# Altium PCB ROBOT_MOTHERBOARD.PcbDoc (part 3 of 3)
Units mm, origin at the board's own origin, x right, y up, seen from the top; angles counter-clockwise.
Board outline 122.81 x 59.7 mm, 4 copper layers (SIG1, GND, PWR, SIG2), stack 0.603 mm thick; 150 components, 74 nets, 540 pads, 464 vias.
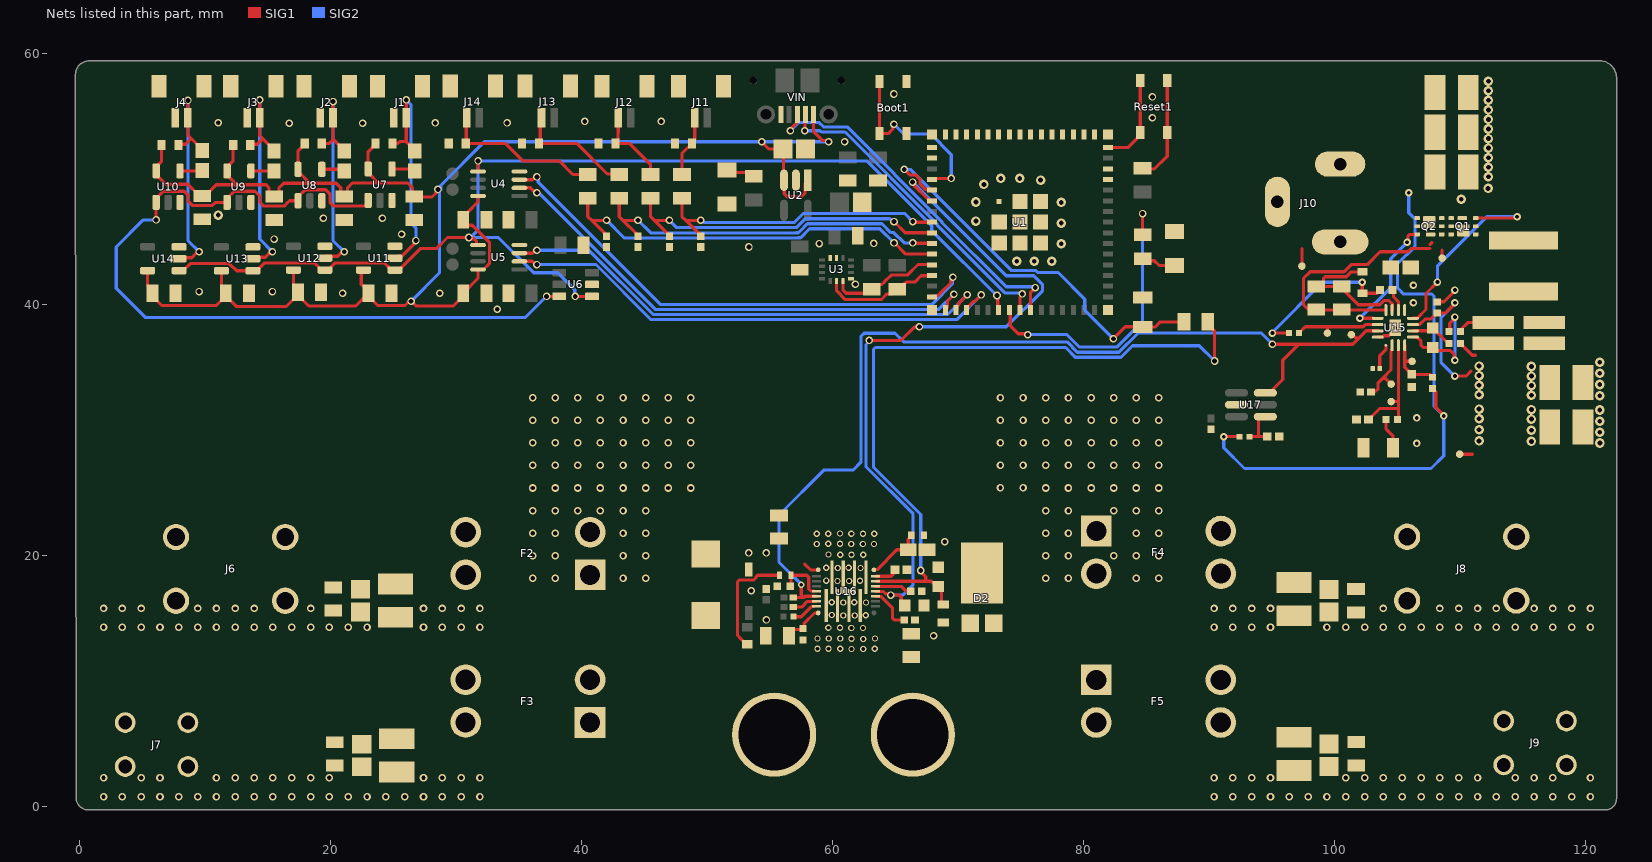
[diagram p4: the nets of this part, all layers, seen from the top]

## Via types
v1: diameter 0.6, hole 0.35, SIG1 to SIG2, 251 vias
v2: diameter 0.6, hole 0.381, SIG1 to SIG2, 93 vias
v3: diameter 0.762, hole 0.381, SIG1 to SIG2, 50 vias
v4: diameter 0.5, hole 0.3, SIG1 to SIG2, 50 vias
v5: diameter 0.6, hole 0.3, SIG1 to SIG2, 18 vias
v6: diameter 4, hole 3.048, SIG1 to SIG2, 2 vias

## Nets (pads, with @x,y where several pads share a name; then routed paths per layer and width w, separated by ;. In a path a pad name is that pad's centre, name@x,y a point inside that pad or via, vN(x,y) a via of type N, cw(c..) or ccw(c..) an arc to the next point about the centre after c; other vN are vias at no path point) (continued)
11V1: C32.1 D1.1 J5.P R18.1 R25.2 R27.1 U16.23 U16.24 U16.25 U16.26 | length 9
  SIG1 w0.254: R27.1@53.213,12.912 53.136,12.912 52.663,13.386 52.427,13.622 52.427,17.889 52.576,18.037 53.736,18.037 53.899,18.2 53.899,18.266 54.047,18.415 R25.2@55.792,18.415
  other v4: 61.512,12.537 62.454,12.548 58.799,12.557 59.688,12.557 60.613,12.557 63.371,12.557 61.521,13.35 62.457,13.345 58.807,13.37 59.696,13.37 60.622,13.37 63.379,13.37 62.434,14.205 59.671,14.224 60.596,14.224 61.505,14.22 60.854,15.217 61.773,15.206 59.946,15.242 62.646,15.227 59.946,16.26 60.865,16.249 61.734,16.262 62.675,16.241
11V1+: C36.1 Cin1.1 Cin2.1 Cvin.2 D2.3 F2.1 F3.1 F4.1 F5.1 pad.2@109.982,28.067 Risns+.1 Rsns1.1 Rsns2.1 U15.7 U16.10 U16.11 U16.12 U16.13 | length 14.9
  SIG1 w0.254: U15.7@106.253,38.398 106.261,38.405 106.813,38.405 107.243,38.835 107.685,38.835 Cvin.2@108.174,39.324 ; Cvin.2@108.204,39.324 108.887,39.324 109.601,40.038 v5(109.601,40.132) ; v5(109.601,34.29) 110.485,34.29 110.871,34.676 ; pad.2@109.982,28.067 110.998,28.067 ; Risns+.1@110.037,36.895 110.986,35.946 111.252,35.946 ; Rsns2.1@112.23,36.844 Rsns2.1@112.248,36.862
  SIG2 w0.254: v5(109.601,34.29) 108.484,35.407 108.484,38.921 109.601,40.038 v5(109.601,40.132)
  other v1: 36.106,18.171 37.906,18.171 43.306,18.171 45.106,18.171 77.006,18.171 78.806,18.171 84.206,18.171 86.006,18.171 36.106,19.971 37.906,19.971 43.306,19.971 45.106,19.971 77.006,19.971 78.806,19.971 82.406,19.971 84.206,19.971 86.006,19.971 36.106,21.771 37.906,21.771 43.306,21.771 45.106,21.771 77.006,21.771 78.806,21.771 84.206,21.771 86.006,21.771 36.106,23.571 37.906,23.571 39.706,23.571 41.506,23.571 43.306,23.571 45.106,23.571 77.006,23.571 78.806,23.571 82.406,23.571 84.206,23.571 86.006,23.571 36.106,25.371 37.906,25.371 39.706,25.371 41.506,25.371 43.306,25.371 45.106,25.371 46.906,25.371 48.706,25.371 73.384,25.378 75.184,25.378 77.006,25.371 78.806,25.371 80.606,25.371 82.406,25.371 84.206,25.371 86.006,25.371 36.106,27.171 37.906,27.171 39.706,27.171 41.506,27.171 43.306,27.171 45.106,27.171 46.906,27.171 48.706,27.171 73.384,27.178 75.184,27.178 77.006,27.171 78.806,27.171 80.606,27.171 82.406,27.171 84.206,27.171 86.006,27.171 36.106,28.971 37.906,28.971 39.706,28.971 41.506,28.971 43.306,28.971 45.106,28.971 46.906,28.971 48.706,28.971 73.384,28.978 75.184,28.978 77.006,28.971 78.806,28.971 80.606,28.971 82.406,28.971 84.206,28.971 86.006,28.971 36.106,30.771 37.906,30.771 39.706,30.771 41.506,30.771 43.306,30.771 45.106,30.771 46.906,30.771 48.706,30.771 73.384,30.778 75.184,30.778 77.006,30.771 78.806,30.771 80.606,30.771 82.406,30.771 84.206,30.771 86.006,30.771 36.106,32.571 37.906,32.571 39.706,32.571 41.506,32.571 43.306,32.571 45.106,32.571 46.906,32.571 48.706,32.571 73.384,32.578 75.184,32.578 77.006,32.571 78.806,32.571 80.606,32.571 82.406,32.571 84.206,32.571 86.006,32.571
  other v3: 115.697,29.083 111.526,29.12 115.697,29.972 111.526,30.009 115.697,30.861 111.526,30.898 115.697,31.623 111.526,31.66 115.697,32.766 111.526,32.803 115.697,33.528 111.526,33.565 115.697,34.29 111.526,34.327 115.697,35.052 111.526,35.089
  other v4: 60.406,17.963 61.325,17.953 59.497,17.989 62.197,17.974 59.497,19.006 60.416,18.996 62.227,18.987 61.285,19.009 59.683,20.07 60.612,20.054 61.52,20.051 62.446,20.051 58.737,20.905 61.495,20.905 62.42,20.905 63.309,20.905 59.659,20.929 60.596,20.925 58.746,21.717 61.504,21.717 62.429,21.717 63.318,21.717 59.663,21.727 60.605,21.737
11V1_F2: C20.1 C21.2 C22.1 F2.2 J6.1_1 J6.1_2
11V1_F3: C23.1 C24.2 C25.1 F3.2 J7.1_1 J7.1_2
11V1_F4: C26.1 C27.2 C28.1 F4.2 J8.2_1 J8.2_2
11V1_F5: C29.1 C30.2 C31.1 F5.2 J9.2_1 J9.2_2
18V: Cout1.1 Cout2.1 Cout3.1 J10.1 pad.2@97.409,43.053 Q2.1 Q2.2 Q2.5 Q2.6 Q2.8 R32.1 Rfbt.2 | length 49.3
  SIG1 w0.254: v5(91.186,29.464) R32.1@92.437,29.464 ; pad.2@97.409,43.053 97.409,44.45 ; Rfbt.2@107.823,33.299 108.077,33.045 108.077,31.795 108.712,31.16 v5(108.712,31.115)
  SIG2 w0.254: v5(91.186,29.464) 91.186,28.575 92.837,26.924 107.696,26.924 108.712,27.94 v5(108.712,31.115) 107.924,31.903 107.924,40.671 107.775,40.82 105.523,40.82 105.029,41.314 105.029,43.253 106.426,44.65 106.426,46.795 105.918,47.303 v5(105.918,48.895)
+5: C3.2 C7.1 C8.1 C9.1 C10.1 C11.1 C12.1 C13.1 C14.1 C16.1 C18.1 R11.2 R13.2 R15.2 R17.2 U2.1 U2.3 U4.8 U5.8 U7.5 U8.5 U9.5 U10.5 U11.5 U12.5 U13.5 U14.5 VIN.1 | length 141.3
  SIG1 w0.254: C14.1@5.418,41.507 U14.5@5.418,42.692 ; C14.1@5.806,40.894 5.806,40.669 6.558,39.917 10.888,39.917 11.648,40.677 12.481,39.844 16.49,39.844 C12.1@17.396,40.75 ; R17.2@6.521,52.705 6.521,51.384 6.101,50.964 U10.5@6.101,50.643 6.101,50.333 6.851,49.583 8.612,49.583 9.554,48.641 C10.1@9.779,48.641 10.004,48.641 10.893,49.53 12.517,49.53 ; U13.5@11.303,42.685 11.303,41.247 C13.1@11.648,40.902 ; U9.5@11.684,50.363 12.517,49.53 ; U9.5@11.684,50.673 11.684,50.898 12.236,51.45 R15.2@12.236,52.705 ; U12.5@17.033,42.738 17.033,41.563 17.396,41.2 C12.1@17.396,40.975 C12.1@17.396,40.75 ; R13.2@17.951,52.832 17.951,52.755 17.399,52.204 17.399,50.775 U8.5@17.404,50.77 17.404,50.606 18.353,49.657 ; U11.5@22.621,42.738 22.606,42.738 22.439,42.572 22.439,41.613 22.588,41.464 22.661,41.464 23.009,41.116 C11.1@23.009,40.891 ; R11.2@23.572,52.832 23.572,52.755 22.992,52.175 U7.5@22.992,50.8 22.992,50.49 23.802,49.68 ; v2(28.553,49.163) 28.553,49.025 28.086,48.557 28.086,48.553 26.703,48.553 C7.1@26.67,48.586 26.526,48.73 26.526,49.293 26.139,49.68 23.802,49.68 ; C16.1@30.571,46.736 30.713,46.878 30.713,46.518 30.919,46.312 31.278,46.312 32.639,44.951 32.639,44.933 32.654,44.918 32.654,43.25 32.188,42.784 U5.8@31.75,42.784 31.75,42.073 C18.1@30.571,40.894 30.571,40.669 29.78,39.878 26.819,39.878 26.438,40.259 v2(26.416,40.259) 26.279,40.259 25.934,39.914 23.761,39.914 23.009,40.666 C11.1@23.009,40.891 ; C16.1@30.695,46.896 30.919,47.12 30.919,47.349 31.751,48.181 U4.8@31.751,48.641 ; v2(54.356,52.959) 54.928,52.387 C3.2@56.056,52.387 ; C3.2@56.097,52.169 56.097,49.812 56.158,49.751 56.158,48.817 56.399,48.577 57.513,48.577 57.816,48.88 57.816,49.631 U2.1@57.997,49.812 ; VIN.1@58.494,55.148 58.494,53.774 59.212,53.056 59.593,53.056 v2(59.69,52.959) ; 12.517,49.53 14.859,49.53 15.096,49.293 15.096,48.934 15.444,48.586 C9.1@15.494,48.586 15.494,48.895 15.853,48.895 15.892,48.934 15.892,49.293 16.256,49.657 18.353,49.657 ; C12.1@17.396,40.75 18.268,39.878 21.996,39.878 C11.1@23.009,40.891 ; 18.353,49.657 20.447,49.657 20.811,49.293 20.811,48.857 C8.1@21.082,48.586 21.353,48.857 21.353,49.293 21.74,49.68 23.802,49.68
  SIG2 w0.254: v2(26.416,40.259) 28.677,42.52 28.677,49.039 v2(28.553,49.163) ; v2@28.681,49.043 28.774,49.136 28.774,49.475 32.258,52.959 v2(54.356,52.959) v2(59.69,52.959)
Blink: R3.1 U1.22 | length 23.7
  SIG1 w0.254: U1.22@74.088,39.556 74.161,39.483 74.161,38.291 74.794,37.658 75.499,37.658 v2(75.565,37.592) ; v2(84.709,47.244) 84.709,45.549 R3.1@84.719,45.539
  SIG2 w0.254: v2(75.565,37.592) 78.692,37.592 79.685,36.599 82.66,36.599 84.709,38.648 v2(84.709,47.244)
Boot: Cboot1.2 Cboot2.2 Dboot.C U15.11 | length 11.6
  SIG1 w0.254: Cboot1.2@98.552,41.438 Cboot1.2@98.777,41.438 ; Cboot2.2@100.505,41.359 101.888,39.976 103.61,39.976 103.938,40.304 104.349,40.304 104.603,40.05 U15.11@104.603,39.549 ; Cboot2.2@100.584,41.438 Cboot1.2@98.777,41.438 ; Dboot.C@102.235,42.594 101.331,42.594 100.936,42.199 99.274,42.199 99.125,42.05 99.125,41.786 Cboot1.2@98.777,41.438 ; Dboot.C@102.262,42.767 Dboot.C@102.362,42.767
COMP: Ccomp2.1 pad.@104.521,32.258 Rcomp.2 U15.3 | length 9.3
  SIG1 w0.254: Ccomp2.1@102.723,30.829 102.744,30.829 103.633,31.718 105.103,31.718 ; pad.@104.521,32.258 105.103,32.258 ; Rcomp.2@105.024,30.829 105.103,30.908 105.103,31.718 ; U15.3@105.103,36.747 105.103,32.258 ; 105.103,31.718 105.103,32.258
D+: U1.24 VIN.3 | length 29
  SIG1 w0.254: v2(56.642,53.848) 56.642,53.968 57.121,54.447 57.121,55.075 VIN.3@57.194,55.148 ; U1.24@75.788,39.35 U1.24@75.788,39.556 75.788,40.969 v2(76.163,41.344)
  SIG2 w0.254: v2(56.642,53.848) 57.3,54.506 58.919,54.506 59.279,54.146 61.17,54.146 68.72,46.596 68.72,46.532 73.842,41.41 76.097,41.41 v2(76.163,41.344)
D-: U1.23 VIN.2 | length 25.4
  SIG1 w0.254: v2(57.785,53.848) 57.814,53.877 57.814,55.119 VIN.2@57.844,55.148 ; U1.23@74.938,39.556 74.938,40.559 75.118,40.739 v2(75.118,40.833)
  SIG2 w0.254: v2(57.785,53.848) 59.006,53.848 59.112,53.742 61.002,53.742 68.316,46.428 68.316,46.365 73.782,40.899 75.052,40.899 v2(75.118,40.833)
DVDT: C37.1 U16.4 | length 3.5
  SIG1 w0.254: U16.4@63.431,16.714 63.895,16.714 64.77,15.84 64.77,15.008 64.919,14.859 C37.1@65.648,14.859
F_PG: pad.@101.346,37.592 R24.2 U15.15 U16.19 U17.6 | length 76.8
  SIG1 w0.254: R24.2@56.872,16.637 57.728,16.637 ; v4(57.512,17.653) 57.512,16.853 57.728,16.637 ; U16.19@58.731,16.738 57.828,16.738 57.728,16.637 ; U17.6@94.495,32.954 94.824,32.954 95.885,34.015 95.885,35.56 97.155,36.83 ; v2(95.063,36.83) 97.155,36.83 ; pad.@101.346,37.592 101.44,37.592 101.734,37.298 101.94,37.298 ; U15.15@103.452,37.898 102.54,37.898 101.94,37.298 ; 97.155,36.83 101.472,36.83 101.94,37.298
  SIG2 w0.254: v4(57.512,17.653) 57.512,17.69 55.734,19.468 55.734,23.222 59.309,26.797 61.635,26.797 62.261,27.423 62.261,27.717 62.265,27.721 62.265,37.443 62.528,37.706 64.983,37.706 65.674,37.015 78.697,37.015 79.517,36.195 82.828,36.195 84.352,37.719 94.174,37.719 v2(95.063,36.83)
FB: pad.@106.187,35.469 Rfbb.1 Rfbt.1 U15.4 | length 4.9
  SIG1 w0.254: U15.4@105.603,36.747 105.603,35.433 ; pad.@106.187,35.469 105.638,35.469 105.603,35.433 ; Rfbt.1@107.823,34.199 107.6,34.422 Rfbb.1@106.172,34.422 105.603,34.989 105.603,35.433
FLT: R19.2 U16.20 | length 2
  SIG1 w0.254: R19.2@56.872,15.875 57.537,15.875 57.996,16.334 U16.20@58.727,16.334
FSR1: J11.2 R6.1 R28.1 | length 4.9
  SIG1 w0.254: R28.1@48,50.351 48,52.03 R6.1@48.802,52.832 ; R6.1@48.802,52.909 49.022,53.129 J11.2@49.022,54.867
FSR2: J12.2 R7.1 R29.1 | length 6.4
  SIG1 w0.254: J12.2@42.926,54.867 42.926,53.67 42.908,53.653 42.908,53.034 R7.1@42.706,52.832 43.815,52.832 45.5,51.147 R29.1@45.5,50.351
FSR3: J13.2 R8.1 R30.1 | length 9.5
  SIG1 w0.254: R8.1@36.61,52.832 36.709,52.931 36.709,54.78 J13.2@36.808,54.879 ; R8.1@36.709,52.832 39.624,52.832 42.064,50.392 42.975,50.392 R30.1@43.017,50.351
FSR4: J14.2 R9.1 R31.1 | length 12.8
  SIG1 w0.254: J14.2@30.839,54.879 30.807,54.847 30.807,52.864 R9.1@30.776,52.832 33.909,52.832 35.306,51.435 38.227,51.435 39.311,50.351 R31.1@40.5,50.351
GND: 38.2 BLINK.2 Boot1.1 Boot1.2 C1.2 C2.2 C3.1 C4. C5.2 C6.1 C7.2 C8.2 C9.2 C10.2 C11.2 C12.2 C13.2 C14.2 C15.2 C16.2 C17.2 C18.2 C19.2 C20.2 C21.1 C22.2 C23.2 C24.1 C25.2 C26.2 C27.1 C28.2 C29.2 C30.1 C31.2 C32.2 C33.2 C34.1 C35.1 C36.2 C37.2 C39.1 C40.2 C41.2 C42.2 C43.2 C44.2 C45.2 CADC.2 Ccomp1.2 Ccomp2.2 Cin1.2 Cin2.2 Cout1.2 Cout2.2 Cout3.2 CR1.2 Css.2 Cvcc.2 Cvin.1 D1.2 D2.1 D2.2 J1.2 J1.3 J1.4 J2.2 J2.3 J2.4 J3.2 J3.3 J3.4 J4.2 J4.3 J4.4 J5.N J6.2_1 J6.2_2 J7.2_1 J7.2_2 J8.1_1 J8.1_2 J9.1_1 J9.1_2 J10.2 J10.3 J11.3 J11.4 J12.3 J12.4 J13.3 J13.4 J14.3 J14.4 PWR.2 Q1.4 Q1.7 R6.2 R7.2 R8.2 R9.2 R21.2 R22.2 R23.1 R26.2 R33.2 Reset1.3 Reset1.4 Rfbb.2 Rt.2 U1.1 U1.2 U1.42 U1.43 U1.45 U1.46 U1.47 U1.48 U1.49 U1.50 U1.51 U1.52 U1.53 U1.54 U1.55 U1.56 U1.57 U1.58 U1.59 U1.60 U1.61 U1.61_1 U1.61_2 U1.61_3 U1.61_4 U1.61_5 U1.61_6 U1.61_7 U1.61_8 U1.62 U1.63 U1.64 U1.65 U2.2 U3.1 U3.6 U3.7 U4.4 U5.4 U6.2 U7.3 U8.3 U9.3 U10.3 U11.3 U12.3 U13.3 U14.3 U15.9 U15.16 U15.17 U16.14 U17.2 VIN.5 | length 12
  SIG1 w0.254: 57.785,19.304 58.245,18.844 U16.14@58.862,18.844 ; U1.45@82.224,52.501 83.527,52.501 84.524,53.498 Reset1.4@84.524,53.698 Reset1.3@84.524,57.848 ; U15.16@103.452,37.398 103.833,37.398 103.937,37.501 103.962,37.501 103.964,37.503 104.335,37.503 104.457,37.625 104.53,37.625 104.853,37.948 v4(104.853,38.148) ; Cvin.1@108.204,40.188 108.224,40.209 108.736,40.209 109.601,41.074 v5(109.601,41.148)
  other v1: 1.906,0.771 3.406,0.771 4.906,0.771 6.406,0.771 7.906,0.771 9.406,0.771 10.906,0.771 12.406,0.771 13.906,0.771 15.406,0.771 16.906,0.771 18.406,0.771 19.906,0.771 21.406,0.771 22.906,0.771 24.406,0.771 25.906,0.771 27.406,0.771 28.906,0.771 30.406,0.771 31.906,0.771 90.406,0.771 91.906,0.771 93.406,0.771 94.906,0.771 96.406,0.771 97.906,0.771 99.406,0.771 100.906,0.771 102.406,0.771 103.906,0.771 105.406,0.771 106.906,0.771 108.406,0.771 109.906,0.771 111.406,0.771 112.906,0.771 114.406,0.771 115.906,0.771 117.406,0.771 118.906,0.771 120.406,0.771 1.906,2.271 4.906,2.271 6.406,2.271 10.906,2.271 12.406,2.271 13.906,2.271 15.406,2.271 16.906,2.271 18.406,2.271 19.906,2.271 27.406,2.271 28.906,2.271 30.406,2.271 31.906,2.271 90.406,2.271 91.906,2.271 93.406,2.271 94.906,2.271 100.906,2.271 102.406,2.271 103.906,2.271 105.406,2.271 106.906,2.271 108.406,2.271 109.906,2.271 111.406,2.271 114.406,2.271 115.906,2.271 117.406,2.271 120.406,2.271 1.906,14.271 3.406,14.271 4.906,14.271 6.406,14.271 7.906,14.271 9.406,14.271 10.906,14.271 12.406,14.271 13.906,14.271 15.406,14.271 16.906,14.271 18.406,14.271 19.906,14.271 21.406,14.271 22.906,14.271 27.406,14.271 28.906,14.271 30.406,14.271 31.906,14.271 90.406,14.271 91.906,14.271 93.406,14.271 94.906,14.271 99.406,14.271 100.906,14.271 102.406,14.271 103.906,14.271 105.406,14.271 106.906,14.271 108.406,14.271 109.906,14.271 111.406,14.271 112.906,14.271 114.406,14.271 115.906,14.271 117.406,14.271 118.906,14.271 120.406,14.271 1.906,15.771 3.406,15.771 4.906,15.771 9.406,15.771 10.906,15.771 12.406,15.771 13.906,15.771 18.406,15.771 27.406,15.771 28.906,15.771 30.406,15.771 31.906,15.771 90.406,15.771 91.906,15.771 93.406,15.771 94.906,15.771 103.906,15.771 108.406,15.771 109.906,15.771 111.406,15.771 112.906,15.771 115.906,15.771 117.406,15.771 118.906,15.771 120.406,15.771
  other v2: 68.053,13.589 54.737,14.859 53.533,17.177 53.321,20.193 54.718,20.193 68.942,21.082 33.274,39.624 20.955,40.894 28.702,40.894 9.525,41.021 15.367,41.021 61.824,41.605 53.34,44.577 58.951,44.85 63.279,44.862 15.494,45.212 25.654,45.593 19.431,46.863 24.13,46.863 60.96,52.959 16.704,54.445 22.546,54.445 28.35,54.46 34.065,54.46 11.049,54.483 40.25,54.584 46.346,54.584 85.496,54.884 85.496,56.535 64.897,56.769
  other v3: 121.158,28.956 121.138,29.808 121.138,30.697 121.138,31.586 121.138,32.729 121.138,33.618 121.138,34.507 121.138,35.396 74.676,43.434 76.073,43.434 77.47,43.434 78.232,44.831 78.232,46.482 71.428,46.639 11.049,47.117 78.232,48.133 71.428,48.163 110.109,48.387 112.248,49.244 72.063,49.56 76.581,49.911 73.406,50.038 74.93,50.038 112.268,50.17 112.268,50.932 112.268,51.694 112.268,52.456 112.268,53.218 112.268,53.98 112.268,54.742 112.268,55.504 112.268,56.266 112.268,57.028 112.268,57.79
  other v5: 106.553,28.923 106.553,30.955 106.299,40.132 106.299,41.529
GPIO1: CADC.1 RADC.2 U1.5 | length 32.3
  SIG1 w0.254: v2(65.717,50.763) 66.155,50.324 66.623,50.324 66.961,49.986 66.961,49.604 67.386,49.179 68.189,49.179 U1.5@68.194,49.174 ; v2(82.386,37.269) 83.344,38.227 CADC.1@84.709,38.227 ; CADC.1@84.709,38.195 84.716,38.202 85.719,38.202 86.126,38.608 RADC.2@88.014,38.608
  SIG2 w0.254: v2(65.717,50.763) 66.204,50.763 74.272,42.695 76.199,42.695 76.349,42.545 77.978,42.545 80.104,40.419 80.104,39.551 v2(82.386,37.269)
GPIO2: C39.2 U1.6 U16.5 | length 58.4
  SIG1 w0.254: v2(62.923,37.129) 65.442,37.129 66.502,38.188 66.901,38.188 v2(66.929,38.216) ; U16.5@63.45,17.118 64.063,17.118 64.246,16.935 64.553,16.935 v2(64.65,16.838) 65.318,16.838 65.486,16.67 65.486,16.275 C39.2@65.759,16.002 ; v2(66.384,49.747) 66.451,49.681 66.451,49.543 67.67,48.324 U1.6@68.194,48.324
  SIG2 w0.254: v2(62.923,37.129) 62.923,37.061 62.669,36.807 62.669,27.554 62.668,27.553 62.668,27.058 66.421,23.305 66.421,17.664 65.595,16.838 v2(64.65,16.838) ; v2(66.384,49.747) 73.841,42.291 76.031,42.291 76.739,41.583 76.739,41.105 73.85,38.216 v2(66.929,38.216)
GPIO4: C41.1 R28.2 U1.8 | length 23.9
  SIG1 w0.254: R28.2@48,48.449 48,47 48.3,46.7 ; C41.1@49.5,45.5 48.3,46.7 ; v2(49.5,46.7) 48.3,46.7 ; v2(66.4,46.6) 66.444,46.556 U1.8@67.938,46.556
  SIG2 w0.254: v2(49.5,46.7) 49.594,46.7 49.767,46.527 56.955,46.527 57.672,47.244 65.756,47.244 v2(66.4,46.6)
GPIO5: C42.1 R29.2 U1.9 | length 26.7
  SIG1 w0.254: R29.2@45.5,48.449 45.5,47 45.8,46.7 ; C42.1@47,45.5 45.8,46.7 ; v2(47,46.7) 45.8,46.7 ; v2@64.897,46.609 65.8,45.706 U1.9@67.938,45.706
  SIG2 w0.254: v2(47,46.7) 47.577,46.123 57.122,46.123 57.832,46.833 64.578,46.833 64.811,46.6 v2(64.9,46.6)
GPIO6: C43.1 R30.2 U1.10 | length 29.8
  SIG1 w0.254: R30.2@42.947,48.446 R30.2@42.972,48.421 ; R30.2@42.985,48.408 R30.2@43,48.408 ; R30.2@43,48.449 R30.2@43,48.408 ; C43.1@44.5,45.5 43.3,46.7 ; v2(44.5,46.7) 43.3,46.7 ; v2(66.4,44.9) 66.422,44.877 U1.10@68.146,44.877 ; R30.2@43,48.408 43,47 43.3,46.7
  SIG2 w0.254: v2(44.5,46.7) 45.503,45.697 57.064,45.697 57.086,45.719 57.289,45.719 57.462,45.892 57.999,46.429 63.942,46.429 64.651,45.72 64.896,45.72 65.716,44.9 v2(66.4,44.9)
GPIO7: C44.1 R31.2 U1.11 | length 32.5
  SIG1 w0.254: R31.2@40.5,48.449 40.5,47 40.8,46.7 ; C44.1@42,45.5 40.8,46.7 ; v2(42,46.7) 40.8,46.7 ; v2@64.897,44.958 65.849,44.006 U1.11@67.938,44.006
  SIG2 w0.254: v2(42,46.7) 43.407,45.293 57.231,45.293 57.253,45.315 57.457,45.315 58.167,46.025 63.775,46.025 v2(64.9,44.9)
GPIO17: U1.21 U4.5 U5.5 U6.1 U11.1 U12.1 U13.1 U14.1 | length 93.3
  SIG1 w0.254: U14.1@7.928,42.692 8.238,42.692 8.803,43.257 11.936,43.257 12.508,42.685 U13.1@13.813,42.685 14.123,42.685 14.745,43.307 16.397,43.307 16.4,43.31 17.666,43.31 17.669,43.307 18.719,43.307 18.91,43.116 18.916,43.116 19.078,42.955 19.078,42.904 19.244,42.738 U12.1@19.543,42.738 19.842,42.738 20.008,42.904 20.008,42.955 20.17,43.116 20.176,43.116 20.367,43.307 21.985,43.307 21.988,43.31 23.254,43.31 23.257,43.307 24.258,43.307 24.498,43.067 24.504,43.067 24.666,42.906 24.666,42.855 24.832,42.689 25.392,42.689 27.153,44.45 28.431,44.45 29.315,45.334 v2(31.023,45.334) 31.12,45.237 31.423,45.237 31.627,45.033 31.627,44.772 31.664,44.734 U5.5@31.75,44.734 ; v2(31.75,51.435) 31.75,50.592 U4.5@31.751,50.591 ; v2(39.497,40.64) U6.1@40.827,40.64 ; v2(73.108,40.712) 73.175,40.646 73.175,39.619 U1.21@73.238,39.556
  SIG2 w0.254: v2(31.023,45.334) v2@31.16,45.334 ; v2(31.75,51.435) 31.75,45.922 31.57,45.743 31.569,45.743 v2@31.16,45.334 ; v2@31.772,51.435 62.738,51.435 67.912,46.261 67.912,45.88 73.08,40.712 v2(73.108,40.712) ; v2(39.497,40.64) 39.452,40.685 39.452,41.165 38.095,42.522 36.176,42.522 33.364,45.334 v2@31.16,45.334
HDRV: Q2.3 U15.13 | length 10
  SIG1 w0.254: v5(102.031,38.891) 102.034,38.894 U15.13@103.1,38.894 ; v5(105.791,44.958) 105.857,45.024 105.857,45.429 106.006,45.578 Q2.3@106.594,45.578
  SIG2 w0.254: v5(102.031,38.891) 104.483,41.343 104.483,43.65 v5(105.791,44.958)
ILIM: R22.1 U16.8 | length 1.9
  SIG1 w0.254: U16.8@63.431,18.337 64.674,18.337 64.953,18.617 R22.1@64.953,18.865
IMON: C35.2 R23.2 RADC.1 U16.7 | length 58.6
  SIG1 w0.254: U16.7@63.511,17.933 64.674,17.933 ccw(c64.674,18.337) 64.677,17.934 65.213,17.938 65.255,17.938 65.259,17.933 67.437,17.933 ; v2(67.037,18.796) 67.037,18.702 67.437,18.303 67.437,17.933 ; R23.2@68.688,16.092 68.688,17.051 68.645,17.094 68.645,17.2 68.327,17.518 68.287,17.518 67.872,17.933 67.437,17.933 ; RADC.1@89.916,38.608 89.916,38.407 90.452,37.871 v2(90.452,35.491)
  SIG2 w0.254: v2(67.037,18.796) 67.037,23.26 63.269,27.028 63.269,36.416 63.418,36.565 78.576,36.565 79.35,35.791 82.995,35.791 83.907,36.703 89.24,36.703 v2(90.452,35.491)
INV-GPIO17: U6.6 U7.1 U8.1 U9.1 U10.1 | length 67
  SIG1 w0.254: v2(6.096,46.736) 6.098,46.738 6.098,48.131 U10.1@6.101,48.133 6.101,48.443 6.673,49.015 8.324,49.015 8.644,48.695 8.644,48.209 8.964,47.889 10.594,47.889 10.838,48.133 U9.1@11.75,48.133 ; U9.1@11.749,48.442 12.322,49.015 13.973,49.015 14.387,48.601 14.387,48.126 14.679,47.834 16.309,47.834 16.518,48.044 16.518,48.05 16.728,48.26 U8.1@17.401,48.26 ; U8.1@17.404,48.26 U8.1@17.401,48.26 ; U7.1@22.992,48.29 22.992,48 22.826,47.834 20.267,47.834 19.947,48.154 19.947,48.822 19.627,49.142 17.976,49.142 17.401,48.568 U8.1@17.401,48.26 ; v2(37.211,40.64) U6.6@38.151,40.64
  SIG2 w0.254: v2(6.096,46.736) 5.08,46.736 2.921,44.577 2.921,41.275 5.23,38.966 35.537,38.966 v2(37.211,40.64)
IREF: C34.2 R21.1 U16.9 | length 4.6
  SIG1 w0.254: U16.9@63.299,18.844 63.322,18.866 63.551,18.866 65.132,20.447 C34.2@66.043,20.447 66.043,21.299 66.283,21.54 R21.1@66.283,21.59
ISNS+: Csns.1 Risns+.2 U15.6 | length 3.5
  SIG1 w0.254: U15.6@106.253,37.898 107.608,37.898 Csns.1@107.823,38.113 ; Csns.1@107.843,38.113 108.913,37.043 108.989,37.043 Risns+.2@109.137,36.895
ISNS-: Csns.2 Risns-.1 U15.5 | length 9.5
  SIG1 w0.254: U15.5@106.253,37.398 106.597,37.398 106.898,37.097 106.898,36.753 107.078,36.573 Csns.2@107.823,36.573 ; Csns.2@107.843,36.573 108.089,36.327 109.225,36.327 109.535,36.018 109.535,35.626 v5(109.601,35.56) ; Risns-.1@109.108,37.832 109.143,37.832 109.287,37.976 109.19,37.976 109.19,38.484 109.601,38.895 v5(109.601,38.989)
  SIG2 w0.254: v5(109.601,35.56) v5(109.601,38.989)
LDRV: Q1.3 U15.8 | length 16.5
  SIG1 w0.254: U15.8@106.253,38.898 106.597,38.898 107.295,39.596 107.295,40.874 v5(108.204,41.783) ; Q1.3@111.252,46.878 114.348,46.878 114.46,46.99 v5(114.554,46.99)
  SIG2 w0.254: v5(108.204,41.783) 108.204,43.053 112.141,46.99 v5(114.554,46.99)
NetBLINK_1: BLINK.1 R3.2 | length 2.8
  SIG1 w0.254: R3.2@84.719,43.637 84.87,43.486 85.655,43.486 86.041,43.1 BLINK.1@87.249,43.1
NetBoot1_3: Boot1.3 Boot1.4 U1.4 | length 14.5
  SIG1 w0.254: Boot1.3@63.755,57.764 Boot1.4@63.755,53.614 64.43,53.614 64.8,53.984 64.8,54.259 v2(64.897,54.356) ; U1.4@68.194,50.024 68.201,50.031 69.462,50.031 v2(69.469,50.038)
  SIG2 w0.254: v2(64.897,54.356) 65.659,53.594 67.818,53.594 69.469,51.943 v2(69.469,50.038)
NetCcomp1_1: Ccomp1.1 Rcomp.1 | length 2.8
  SIG1 w0.254: Rcomp.1@104.12,30.829 104.12,30.067 104.66,29.527 Ccomp1.1@104.66,28.289
NetCvcc_1: Cvcc.1 Dboot.A Rpg.1 Rvcc.2 | length 12.4
  SIG1 w0.254: v5(95.063,37.719) Rpg.1@96.372,37.719 ; v5(102.218,41.767) 102.218,40.911 Dboot.A@102.235,40.894 ; Dboot.A@102.386,40.894 103.381,40.894 Rvcc.2@103.64,41.153
  SIG2 w0.254: v5@94.996,37.719 99.044,41.767 v5(102.218,41.767)
NetL1_1: L1.1 Risns-.2 Rsns1.2 Rsns2.2 | length 3.4
  SIG1 w0.254: Risns-.2@110.051,37.978 110.622,38.549 Rsns2.2@111.363,38.549 ; Rsns2.2@111.326,38.512 Rsns2.2@111.363,38.549 ; Rsns2.2@111.761,38.947 Rsns2.2@111.363,38.549 ; Rsns2.2@112.649,38.549 Rsns2.2@111.363,38.549
NetPWR_1: PWR.1 R2.2 | length 2.3
  SIG1 w0.254: PWR.1@51.6,50.697 51.788,50.509 53.439,50.509 R2.2@53.721,50.227
NetR1_2: R1.2 Reset1.1 Reset1.2 | length 8.4
  SIG1 w0.254: R1.2@84.709,50.862 84.771,50.8 85.663,50.8 86.674,51.811 Reset1.2@86.674,53.698 Reset1.1@86.674,57.848
NetR10_1: R10.1 U7.4 | length 1.9
  SIG1 w0.254: U7.4@24.892,50.8 26.538,50.8 R10.1@26.704,50.634
NetR12_1: R12.1 U8.4 | length 1.8
  SIG1 w0.254: U8.4@19.304,50.77 20.946,50.77 R12.1@21.082,50.634
NetR14_1: R14.1 U9.4 | length 1.8
  SIG1 w0.254: U9.4@13.65,50.643 15.485,50.643 R14.1@15.494,50.634
NetR16_1: R16.1 U10.4 | length 1.8
  SIG1 w0.254: U10.4@8.001,50.643 9.749,50.643 R16.1@9.779,50.673
NetR32_2: R32.2 R33.1 U17.4 | length 3.5
  SIG1 w0.254: R32.2@93.237,29.464 93.943,29.464 ; U17.4@94.495,31.054 94.108,31.054 93.943,30.889 93.943,29.464 ; R33.1@94.648,29.464 93.943,29.464
NetRpg_2: pad.@99.441,37.719 Rpg.2 U15.14 | length 7.1
  SIG1 w0.254: Rpg.2@97.176,37.719 97.684,38.227 99.441,38.227 ; pad.@99.441,37.719 99.441,38.227 ; U15.14@103.452,38.398 102.469,38.398 102.298,38.227 99.441,38.227
RT/CLK: Rt.1 U15.1 | length 2
  SIG1 w0.254: Rt.1@103.612,34.893 103.612,35.898 104.103,36.388 U15.1@104.103,36.735
RX1: U1.15 U4.3 | length 42.7
  SIG1 w0.254: U4.3@35.052,49.941 36.088,49.941 36.312,50.165 v2(36.449,50.165) ; U1.15@67.938,40.606 68.011,40.679 68.399,40.679 68.755,41.035 69.426,41.706 69.426,41.857 69.596,42.027 v2(69.596,42.164)
  SIG2 w0.254: v2(36.449,50.165) 36.546,50.068 36.546,49.728 46.27,40.005 67.945,40.005 69.565,41.625 69.565,42.133 v2(69.596,42.164)
RX2: U1.17 U5.3 | length 40.1
  SIG1 w0.254: U5.3@35.051,44.084 36.073,44.084 36.312,44.323 v2(36.449,44.323) ; U1.17@69.838,39.556 69.911,39.629 69.911,39.829 70.063,39.982 70.063,40.091 v2(70.739,40.767)
  SIG2 w0.254: v2(36.449,44.323) 40.577,44.323 45.703,39.197 69.169,39.197 v2(70.739,40.767)
SCL: R4.2 U1.13 U3.13 | length 9.7
  SIG1 w0.254: U3.13@60.325,41.885 60.325,41.085 61.024,40.386 63.881,40.386 63.928,40.433 63.938,40.433 64.1,40.595 64.1,40.605 64.332,40.837 64.775,40.837 R4.2@65.151,41.213 65.352,41.213 65.728,41.589 65.728,41.634 65.877,41.783 66.548,41.783 67.056,42.291 U1.13@68.152,42.291
SDA: R5.2 U1.12 U3.14 | length 9.1
  SIG1 w0.254: U3.14@60.825,41.885 60.825,41.156 61.087,40.894 62.8,40.894 R5.2@63.119,41.213 63.495,41.589 63.941,41.589 64.17,41.818 64.17,41.831 64.332,41.993 64.345,41.993 64.687,42.335 65.97,42.335 66.815,43.18 U1.12@68.156,43.18
SIG1A: J1.1 R10.2 R11.1 U11.2 | length 19.4
  SIG1 w0.254: R11.1@24.926,52.832 25.355,52.832 25.502,52.979 26.035,52.979 ; U11.2@25.145,43.653 25.335,43.843 25.682,43.843 26.797,44.958 v2(26.797,45.085) ; v2(26.035,56.297) J1.1@26.035,54.864 26.035,52.979 ; R10.2@26.704,52.236 26.704,52.31 26.035,52.979
  SIG2 w0.254: v2(26.035,56.297) 26.035,56.275 26.416,55.894 26.416,46.482 26.797,46.101 v2(26.797,45.085)
SIG1B: J2.1 R12.2 R13.1 U12.2 | length 19.4
  SIG1 w0.254: R13.1@19.304,52.832 19.9,52.832 20.193,53.125 ; U12.2@19.543,43.688 19.693,43.838 20.587,43.838 20.945,44.196 v2(21.082,44.196) ; v2(20.193,56.17) J2.1@20.193,54.864 20.193,53.125 ; R12.2@21.082,52.236 21.082,52.31 20.267,53.125 20.193,53.125
  SIG2 w0.254: v2(20.193,56.17) 20.193,45.085 v2(21.082,44.196)
SIG2A: J3.1 R14.2 R15.1 U13.2 | length 20.1
  SIG1 w0.254: R15.1@13.589,52.705 13.643,52.759 14.151,52.759 14.598,53.206 ; U13.2@13.813,43.635 13.943,43.765 14.799,43.765 15.23,44.196 v2(15.367,44.196) ; v2(14.351,56.297) 14.347,56.293 14.347,54.871 J3.1@14.343,54.867 14.343,53.461 14.598,53.206 ; R14.2@15.494,52.236 15.494,52.31 14.598,53.206
  SIG2 w0.254: v2(14.351,56.297) 14.351,45.212 v2(15.367,44.196)
SIG2B: J4.1 R16.2 R17.1 U14.2 | length 20
  SIG1 w0.254: R17.1@7.874,52.705 7.928,52.759 8.436,52.759 8.903,53.226 ; U14.2@7.928,43.642 8.009,43.723 8.921,43.723 9.394,44.196 v2(9.525,44.196) ; v2(8.636,56.261) 8.632,56.257 8.632,54.871 J4.1@8.628,54.867 8.628,53.5 8.903,53.226 ; R16.2@9.779,52.275 9.779,52.349 8.903,53.226
  SIG2 w0.254: v2(8.636,56.261) 8.636,45.085 v2(9.525,44.196)
SS: Css.1 pad.@104.521,33.655 U15.2 | length 4.8
  SIG1 w0.254: 103.23,33.02 103.481,33.272 103.481,33.758 103.844,34.121 ; pad.@104.521,33.655 104.055,34.121 103.844,34.121 ; U15.2@104.595,36.396 104.499,36.3 104.499,34.776 103.844,34.121
SW: Cboot1.1 Cboot2.1 L1.2 pad.2@108.585,43.688 Q1.1 Q1.2 Q1.5 Q1.6 Q1.8 Q2.4 Q2.7 U15.12 | length 20.7
  SIG1 w0.254: U15.12@104.095,39.566 100.203,39.566 97.939,39.566 97.536,39.969 97.536,42.073 98.066,42.603 100.769,42.603 101.337,43.171 102.607,43.171 103.632,44.196 105.845,44.196 106.099,44.45 107.617,44.45 ; 107.636,44.789 107.756,44.908 ; pad.2@108.585,43.688 108.585,44.323
SWEN: R20.1 U16.21 | length 1.9
  SIG1 w0.254: R20.1@56.898,15.113 57.513,15.113 58.315,15.914 U16.21@58.508,15.914
TIMER: 38.1 U16.6 | length 3
  SIG1 w0.254: U16.6@63.431,17.53 65.493,17.53 65.877,17.145 38.1@66.246,17.145
TX1: U1.16 U4.2 | length 40.7
  SIG1 w0.254: U4.2@35.052,49.291 35.918,49.291 36.314,48.895 v2(36.449,48.895) ; U1.16@68.988,39.556 69.168,39.737 69.168,40.244 69.68,40.757 v2(69.68,40.81)
  SIG2 w0.254: v2(36.449,48.895) 36.576,48.895 45.87,39.601 68.472,39.601 v2(69.68,40.81)
TX2: U1.18 U5.2 | length 41.3
  SIG1 w0.254: U5.2@35.051,43.434 36.059,43.434 36.313,43.18 v2(36.449,43.18) ; U1.18@70.688,39.556 70.688,39.756 70.761,39.829 70.819,39.829 71.223,40.233 71.339,40.233 v2(71.86,40.754)
  SIG2 w0.254: v2(36.449,43.18) 41.148,43.18 45.535,38.793 69.898,38.793 v2(71.86,40.754)
UVLO: R25.1 R26.1 U16.18 | length 3.8
  SIG1 w0.254: R26.1@56.64,17.526 56.692,17.578 R25.1@56.692,18.415 57.955,18.415 58.104,18.266 58.104,17.323 58.266,17.161 U16.18@58.508,17.161
Vcc: Rvcc.1 U15.10 | length 1.8
  SIG1 w0.254: Rvcc.1@104.64,41.153 104.704,41.089 104.704,40.596 105.095,40.205 105.095,39.556 U15.10@105.103,39.549
VDD: C33.1 R18.2 U16.22 | length 3.4
  SIG1 w0.254: C33.1@56.405,13.716 56.405,13.749 56.753,14.097 57.57,14.097 R18.2@57.639,14.166 57.718,14.245 57.718,14.557 58.566,15.405 58.848,15.405 U16.22@58.862,15.419
pads on no net: U1.7 U1.14 U1.19 U1.20 U1.25 U1.26 U1.27 U1.28 U1.29 U1.30 U1.31 U1.32 U1.33 U1.34 U1.35 U1.36 U1.37 U1.38 U1.39 U1.40 U1.41 U1.44 U2.4 U3.2 U3.3 U3.4 U3.9 U3.10 U3.11 U6.3 U6.4 U16.1 U16.2 U16.3 U16.15 U16.16 U16.17 U17.1 VIN.4 VIN.6 VIN.7 VIN.8 VIN.9 VIN.10 VIN.11
copper on no net:
  other v6: 3.227,55.85 119.178,55.977

## Polygon pours and split planes (outlines as drawn)
11V1+ on SIG1 "11V1+_L01_P103" (solid, pour order 103): 69.977,15.875 74.549,15.875 74.549,22.606 69.977,22.606
GND on SIG1 "GND_L01_P102" (solid, pour order 102): 64.257,13.883 63.881,14.258 63.881,20.066 65.786,21.971 69.977,21.971 69.977,13.842
GND on SIG1 "GND_L01_P070" (solid, pour order 70): 65.273,12.7 65.273,15.875 74.276,15.875 74.276,12.7
11V1 on SIG1 "11V1_L01_P066" (solid, pour order 66): 56.369,11.557 56.369,12.026 59.081,14.738 59.036,14.782 59.036,17.05 63.081,17.05 63.081,14.738 63.095,14.738 65.767,12.065 65.767,11.557
18V on SIG1 "18V_L01_P059" (solid, pour order 59): 109.035,58.674 109.035,46.177 108.841,45.984 105.073,45.984 102.777,43.688 96.664,43.688 96.664,49.657 103.793,49.657 103.793,58.674
SW on SIG1 "SW_L01_P007" (solid, pour order 7): 118.364,44.196 107.188,44.196 107.188,46.355 117.724,46.355 118.364,45.715
GND on SIG1 "GND_L01_P008" (solid, pour order 8): 110.744,46.733 109.093,46.733 109.093,58.674 121.92,58.674 121.92,27.305 118.745,27.305 118.745,47.752 110.744,47.752
GND on SIG1 "GND_L01_P101" (solid, pour order 101): 0.332,26.281 0.283,26.33 0.283,36.957 1.397,36.957 1.27,36.83 1.27,26.452
GND on SIG1 "GND_L01_P055" (solid, pour order 55): 103.263,35.947 103.263,33.914 102.883,33.914 102.415,33.446 102.415,30.093 102.959,30.093 103.485,29.567 103.485,27.31 105.41,27.31 105.41,33.914 107.696,33.914 107.696,27.31 98.293,27.31 97.897,27.706 97.897,36.576 100.723,36.576 101.866,37.719 104.546,37.719 103.739,36.912 103.739,36.417
GND on SIG1 "GND_L01_P061" (solid, pour order 61): 0.22,36.703 0.22,58.386 0.615,58.781 103.823,58.781 103.823,49.721 96.694,49.721 96.694,43.752 93.173,36.703
GND on SIG1 "GND_L01_P098" (solid, pour order 98): 0.485,25.953 33.655,25.953 33.655,33.158 34.577,34.081 87.155,34.081 88.679,32.557 88.679,26.969 89.314,26.969 89.822,26.461 89.822,25.699 89.949,25.826 121.92,25.826 121.92,26.714 97.618,26.715 97.188,27.145 97.188,44.036 95.625,45.599 86.901,36.875 86.647,37.129 0.454,37.129
11V1_F4 on SIG1 "11V1_F4_L01_P097" (solid, pour order 97): 89.027,24.257 90.17,24.257 90.17,26.797 89.662,27.305 89.027,27.305
11V1_F2 on SIG1 "11V1_F2_L01_P096" (solid, pour order 96): 33.274,24.384 32.131,24.384 32.131,26.924 32.639,27.432 33.274,27.432
GND on SIG1 "GND_L01_P095" (solid, pour order 95): 88.773,16.667 121.92,16.667 121.92,12.543 88.773,12.543
GND on SIG1 "GND_L01_P093" (solid, pour order 93): 88.773,4.348 121.92,4.348 121.92,0.731 121.413,0.224 88.773,0.224
GND on SIG1 "GND_L01_P092" (solid, pour order 92): 0.254,4.318 33.274,4.318 33.274,0.224 0.792,0.224 0.254,0.762
GND on SIG1 "GND_L01_P091" (solid, pour order 91): 0.285,16.51 0.25,16.475 0.25,13.081 33.274,13.081 33.274,16.51
11V1 on SIG1 "11V1_L01_P002" (solid, pour order 2): 44.958,0.224 76.835,0.224 76.835,12.7 44.958,12.7
11V1_F5 on SIG1 "11V1_F5_L01_P087" (solid, pour order 87): 88.901,4.215 106.934,4.215 121.92,4.215 121.92,13.105 88.875,13.105
11V1_F2 on SIG1 "11V1_F2_L01_P064" (solid, pour order 64): 0.285,16.51 33.274,16.51 33.274,26.289 0.285,26.289
11V1_F4 on SIG1 "11V1_F4_L01_P085" (solid, pour order 85): 88.773,16.51 121.92,16.51 121.92,26.162 88.773,26.162
GND on SIG1 "GND_L01_P083" (solid, pour order 83): 64.256,14.872 63.608,14.224 65.132,12.7 65.765,12.7 66.021,12.96 66.021,15.335
11V1 on SIG1 "11V1_L01_P004" (solid, pour order 4): 57.189,10.064 57.189,13.716 59.187,13.716
11V1+ on SIG1 "11V1+_L01_P081" (solid, pour order 81): 74.168,0.224 88.881,0.224 88.881,22.733 74.168,22.733
11V1+ on SIG1 "11V1+_L01_P094" (solid, pour order 94): 33.328,22.384 33.328,0.257 47.914,0.257 47.914,22.384
GND on SIG1 "GND_L01_P079" (solid, pour order 79): 47.625,16.891 47.625,22.733 55.353,22.733 55.734,22.352 55.734,21.971 56.672,21.971 58.104,20.539 58.104,18.161 52.305,18.161 52.305,16.925 52.272,16.891
11V1 on SIG1 "11V1_L01_P074" (solid, pour order 74): 47.625,12.075 47.625,16.891 52.432,16.891 52.432,11.938
GND on SIG1 "GND_L01_P073" (solid, pour order 73): 52.875,17.888 53.021,18.034 56.199,18.034 56.199,16.989 56.199,16.618 52.868,16.618
GND on SIG1 "GND_L01_P072" (solid, pour order 72): 53.88,11.43 53.88,15.494 55.607,15.494 55.607,11.43
11V1+ on SIG1 "11V1+_L01_P006" (solid, pour order 6): 71.863,22.459 71.863,19.538 74.403,19.538 74.403,22.459
11V1+ on SIG1 "11V1+_L01_P068" (solid, pour order 68): 33.436,22.098 88.881,22.098 88.881,33.039 87.503,34.417 34.925,34.417 33.436,32.928
11V1+ on SIG1 "11V1+_L01_P067" (solid, pour order 67): 59.163,17.159 62.973,17.159 62.973,19.455 66.263,22.745 65.894,23.114 56.496,23.114 56.496,22.147 59.163,19.48
11V1_F3 on SIG1 "11V1_F3_L01_P063" (solid, pour order 63): 0.3,4.191 18.034,4.191 33.274,4.191 33.274,13.081 0.273,13.081
11V1+ on SIG1 "11V1+_L01_P051" (solid, pour order 51): 118.491,27.31 118.491,37.433 110.617,37.433 110.617,27.31
GND on SIG1 "GND_L01_P056" (solid, pour order 56): 105.43,43.561 106.648,43.561 106.998,43.211 106.998,39.093 106.893,38.989 105.41,38.989
NetL1_1 on SIG1 "NETL1_1_L01_P050" (solid, pour order 50): 118.342,37.788 110.468,37.788 110.468,41.099 111.337,41.968 118.342,41.968
NetCvcc_1 on SIG1 "NETCVCC_1_L01_P052" (solid, pour order 52): 103.034,40.656 104.134,40.656 104.134,41.719 105.197,41.719 105.197,43.561 103.034,43.561
11V1 on SIG2 "11V1_L04_P009" (solid, pour order 9): 57.523,13.343 57.523,16.644 64.643,16.644 64.643,13.335 63.38,12.072 58.794,12.072
11V1+ on SIG2 "11V1+_L04_P099" (solid, pour order 99): 33.401,17.272 33.401,32.893 35.052,34.544 49.53,34.544 49.53,17.272
11V1+ on SIG2 "11V1+_L04_P086" (solid, pour order 86): 57.545,17.529 57.545,22.352 64.643,22.352 64.643,17.529
11V1+ on SIG2 "11V1+_L04_P100" (solid, pour order 100): 72.771,17.272 72.771,34.544 87.376,34.544 88.9,33.02 88.9,17.272
GND on SIG2 "GND_L04_P090" (solid, pour order 90): 74.833,17.145 74.892,17.086 103.662,17.086 103.662,7.62 74.833,7.62
GND on SIG2 "GND_L04_P089" (solid, pour order 89): 75.251,8.412 105.731,8.412 105.731,0.254 75.251,0.254
GND on SIG2 "GND_L04_P088" (solid, pour order 88): 103.505,0.224 103.505,24.384 121.92,24.384 121.92,0.731 121.413,0.224
GND on SIG2 "GND_L04_P084" (solid, pour order 84): 18.542,17.145 18.601,17.086 47.371,17.086 47.371,7.62 18.542,7.62
GND on SIG2 "GND_L04_P078" (solid, pour order 78): 16.256,8.382 46.736,8.382 46.736,0.224 16.256,0.224
GND on SIG2 "GND_L04_P077" (solid, pour order 77): 42.018,0.224 42.018,16.637 80.245,16.637 80.245,0.224
GND on SIG2 "GND_L04_P076" (solid, pour order 76): 0.254,0.762 0.254,24.384 18.669,24.384 18.669,0.254 0.762,0.254
11V1+ on SIG2 "11V1+_L04_P011" (solid, pour order 11): 118.217,27.31 110.617,27.31 110.617,37.433 118.217,37.433
GND on SIG2 "GND_L04_P012" (solid, pour order 12): 118.852,27.31 121.92,27.31 121.92,48.387 118.852,48.387
18V on SIG2 "18V_L04_P053" (solid, pour order 53): 105.41,46.355 102.87,43.815 96.757,43.815 96.757,49.784 105.41,49.784
GND on SIG2 "GND_L04_P010" (solid, pour order 10): 97.897,27.305 107.676,27.305 107.676,40.513 105.39,40.513 105.39,38.862 97.897,38.862
GND on SIG2 "GND_L04_P013" (solid, pour order 13): 105.757,41.148 106.929,41.148 112.903,49.466 112.903,58.552 106.908,58.552 106.773,48.158 106.773,44.416 105.757,43.4
11V1+ on PWR (split plane): 121.244,58.899 121.351,58.877 121.455,58.842 121.553,58.794 121.645,58.733 121.727,58.66 121.799,58.578 121.86,58.487 121.909,58.388 121.944,58.285 121.965,58.177 121.973,58.068 121.97,58.031 121.972,58.031 121.97,58.009 121.97,0.605 121.971,0.596 121.964,0.531 121.942,0.46 121.907,0.394 121.86,0.336 121.802,0.289 121.736,0.254 121.665,0.232 121.599,0.225 121.591,0.226 0.687,0.227 0.686,0.227 0.685,0.227 0.674,0.226 0.595,0.233 0.509,0.26 0.429,0.302 0.359,0.359 0.302,0.429 0.26,0.509 0.233,0.595 0.225,0.675 0.227,0.685 0.227,0.686 0.182,58.332 0.181,58.341 0.187,58.42 0.208,58.506 0.242,58.588 0.288,58.664 0.346,58.732 0.413,58.789 0.489,58.836 0.571,58.87 0.657,58.89 0.734,58.896 0.741,58.896 66.72,58.896 66.72,54.356 66.729,54.256 66.758,54.161 66.806,54.072 66.869,53.995 66.946,53.932 67.035,53.884 67.13,53.855 67.23,53.846 82.63,53.846 82.73,53.855 82.825,53.884 82.914,53.932 82.991,53.995 83.054,54.072 83.102,54.161 83.131,54.256 83.14,54.356 83.14,58.896 121.07,58.896 121.071,58.896 121.073,58.896 121.121,58.901 121.159,58.904
GND on GND (split plane): 121.244,58.899 121.351,58.877 121.455,58.842 121.553,58.794 121.645,58.733 121.727,58.66 121.799,58.578 121.86,58.487 121.909,58.388 121.944,58.285 121.965,58.177 121.973,58.068 121.97,58.031 121.972,58.031 121.97,58.009 121.97,0.605 121.971,0.596 121.964,0.531 121.942,0.46 121.907,0.394 121.86,0.336 121.802,0.289 121.736,0.254 121.665,0.232 121.599,0.225 121.591,0.226 0.687,0.227 0.686,0.227 0.685,0.227 0.674,0.226 0.595,0.233 0.509,0.26 0.429,0.302 0.359,0.359 0.302,0.429 0.26,0.509 0.233,0.595 0.225,0.675 0.227,0.685 0.227,0.686 0.182,58.332 0.181,58.341 0.187,58.42 0.208,58.506 0.242,58.588 0.288,58.664 0.346,58.732 0.413,58.789 0.489,58.836 0.571,58.87 0.657,58.89 0.734,58.896 0.741,58.896 66.72,58.896 66.72,54.356 66.729,54.256 66.758,54.161 66.806,54.072 66.869,53.995 66.946,53.932 67.035,53.884 67.13,53.855 67.23,53.846 82.63,53.846 82.73,53.855 82.825,53.884 82.914,53.932 82.991,53.995 83.054,54.072 83.102,54.161 83.131,54.256 83.14,54.356 83.14,58.896 121.07,58.896 121.071,58.896 121.073,58.896 121.121,58.901 121.159,58.904

## Other copper
SIG1:
  pour cut-out: 120.65,58.928 120.843,59.121 121.985,59.121 121.985,57.847 122.047,57.785

## Silkscreen, mask and mechanical layers (free items; w line width, h text height)
Top Overlay:
  lines w0.15: 58.531,15.13 58.531,14.837 58.648,14.837 ; 58.531,19.132 58.531,19.437 58.646,19.437 ; 63.518,14.837 63.631,14.837 63.631,15.133 ; 63.537,19.437 63.631,19.437 63.631,19.17
  text "Cout3" at 107.181,55.885 h0.9 r90
  text "R13" at 17.272,53.856 h1.14
  text "R11" at 23.114,53.848 h1.14
  text "R15" at 11.557,53.729 h1.14
  text "R17" at 5.715,53.721 h1.14
  text "R10" at 26.416,53.094 h1.14
  text "R12" at 20.701,53.086 h1.14
  text "R16" at 9.017,52.967 h1.14
  text "R14" at 14.732,52.959 h1.14
  text "Cout2" at 107.181,52.837 h0.9 r90
  text "BOOT" at 63.5,52.208 h1.52
  text "RESET" at 83.82,52.208 h1.52
  text "C3" at 54.102,51.57 h1.14
  text "U4" at 32.893,51.316 h1.14
  text "TP1" at 28.959,50.913 h1.14
  text "U7" at 23.495,50.681 h1.14
  text "U8" at 17.855,50.563 h1.14
  text "C2" at 64.643,50.553 h1.14
  text "U9" at 12.192,50.427 h1.14
  text "C1" at 59.436,50.426 h1.14
  text "Cout1" at 107.181,49.789 h0.9 r90
  text "R1" at 85.725,49.53 h1.14
  text "Q2" at 106.426,48.4 h0.9
  text "Q1" at 110.744,48.273 h0.9
  text "TP2" at 28.956,47.879 h1.14
  text "C4" at 63.5,47.759 h1.14
  text "C15" at 33.655,47.506 h1.14
  text "C16" at 31.421,47.469 h1.14
  text "U2" at 56.642,47.252 h1.14
  text "BLINK" at 86.096,47.19 h1.14
  text "U10" at 7.239,46.744 h1.14
  text "R2" at 53.34,46.736 h1.14
  text "L1" at 114.554,46.487 h0.9
  text "C5" at 60.579,46.363 h1.14
  text "R3" at 84.328,46.236 h1.14
  text "C19" at 38.354,45.981 h1.14
  text "PWR" at 50.927,45.974 h1.14
  text "C10" at 9.017,45.601 h1.14
  text "C8" at 20.574,45.601 h1.14
  text "C9" at 14.986,45.6 h1.14
  text "C7" at 26.162,45.6 h1.14
  text "U5" at 32.893,45.474 h1.14
  text "TP3" at 28.893,44.872 h1.14
  text "Cvcc" at 104.345,44.207 h0.9
  text "R5" at 62.738,43.696 h1.14
  text "R4" at 64.643,43.688 h1.14
  text "U14" at 4.191,43.315 h1.14
  text "U13" at 10.16,43.315 h1.14
  text "U12" at 15.875,43.315 h1.14
  text "U11" at 21.463,43.315 h1.14
  text "Dboot" at 101.219,42.933 h0.9
  text "TP7" at 108.077,42.926 h0.7
  text "TP6" at 96.901,42.296 h0.7
  text "TP4" at 28.829,42.009 h1.14
  text "U3" at 59.817,41.791 h1.14
  text "C6" at 56.812,41.156 h1.14
  text "Cvin" at 107.295,40.626 h0.9
  text "Rvcc" at 103.378,40.264 h0.9
  text "C12" at 17.526,39.504 h1.14
  text "C11" at 23.172,39.501 h1.14
  text "C18" at 30.734,39.378 h1.14
  text "C14" at 5.969,39.377 h1.14
  text "C17" at 34.29,39.377 h1.14
  text "C13" at 11.811,39.259 h1.14
  text "U6" at 38.989,39.124 h1.14
  text "Rpg" at 96.138,38.551 h0.9
  text "Cb1" at 97.917,38.487 h0.9
  text "Cb2" at 99.949,38.487 h0.9
  text "TP12" at 97.917,37.592 h0.7
  text "TP11" at 100.076,36.957 h0.7
  text "U15" at 101.981,36.461 h0.9
  text "Rsns2" at 111.506,35.948 h0.9
  text "Rsns1" at 115.697,35.948 h0.9
  text "TP8" at 105.664,35.819 h0.7
  text "Csns" at 106.934,35.694 h0.9
  text "Cin2" at 117.729,35.312 h0.9
  text "Rt" at 101.727,34.681 h0.9
  text "TP10" at 103.797,34.079 h0.7
  text "Css" at 99.949,32.778 h0.9
  text "Rfbb" at 105.41,32.516 h0.9
  text "Rfbt" at 107.061,31.755 h0.9
  text "TP9" at 104.013,31.623 h0.7
  text "Ccomp2" at 98.679,30.639 h0.9
  text "Rcomp" at 103.505,29.496 h0.9
  text "TP5" at 109.601,28.453 h0.7
  text "Cin1" at 117.729,28.2 h0.9
  text "Ccomp1" at 98.933,28.099 h0.9
Mechanical 1:
  lines w0.254: 0.686,59.406 121.07,59.406 ; 0.746,59.406 ccw(c0.746,58.331) -0.329,58.331 -0.284,0.685 ccw(c0.685,0.685) 0.685,-0.284 0.687,-0.284 121.591,-0.284 ccw(c121.591,0.605) 122.48,0.605 122.48,58.009 ccw(c121.134,58.068) 121.07,59.413

## Text inside footprints (layer, text, board x,y; h text height)
U3: Mechanical 13 "*" at 61.557,42.434 h1.27 r180
VIN: Mechanical 1 "PCB EDGE" at 64.394,59.398 h0.3 r180